# Altium PCB RodManipulator_PCB.PcbDoc
Units mm, origin at the board's own origin, x right, y up, seen from the top; angles counter-clockwise.
Board outline 49.22 x 28.83 mm, 2 copper layers (Top Layer, Bottom Layer); 64 components, 43 nets, 207 pads, 80 vias.
Unrouted connection lines stored in the file: 2.
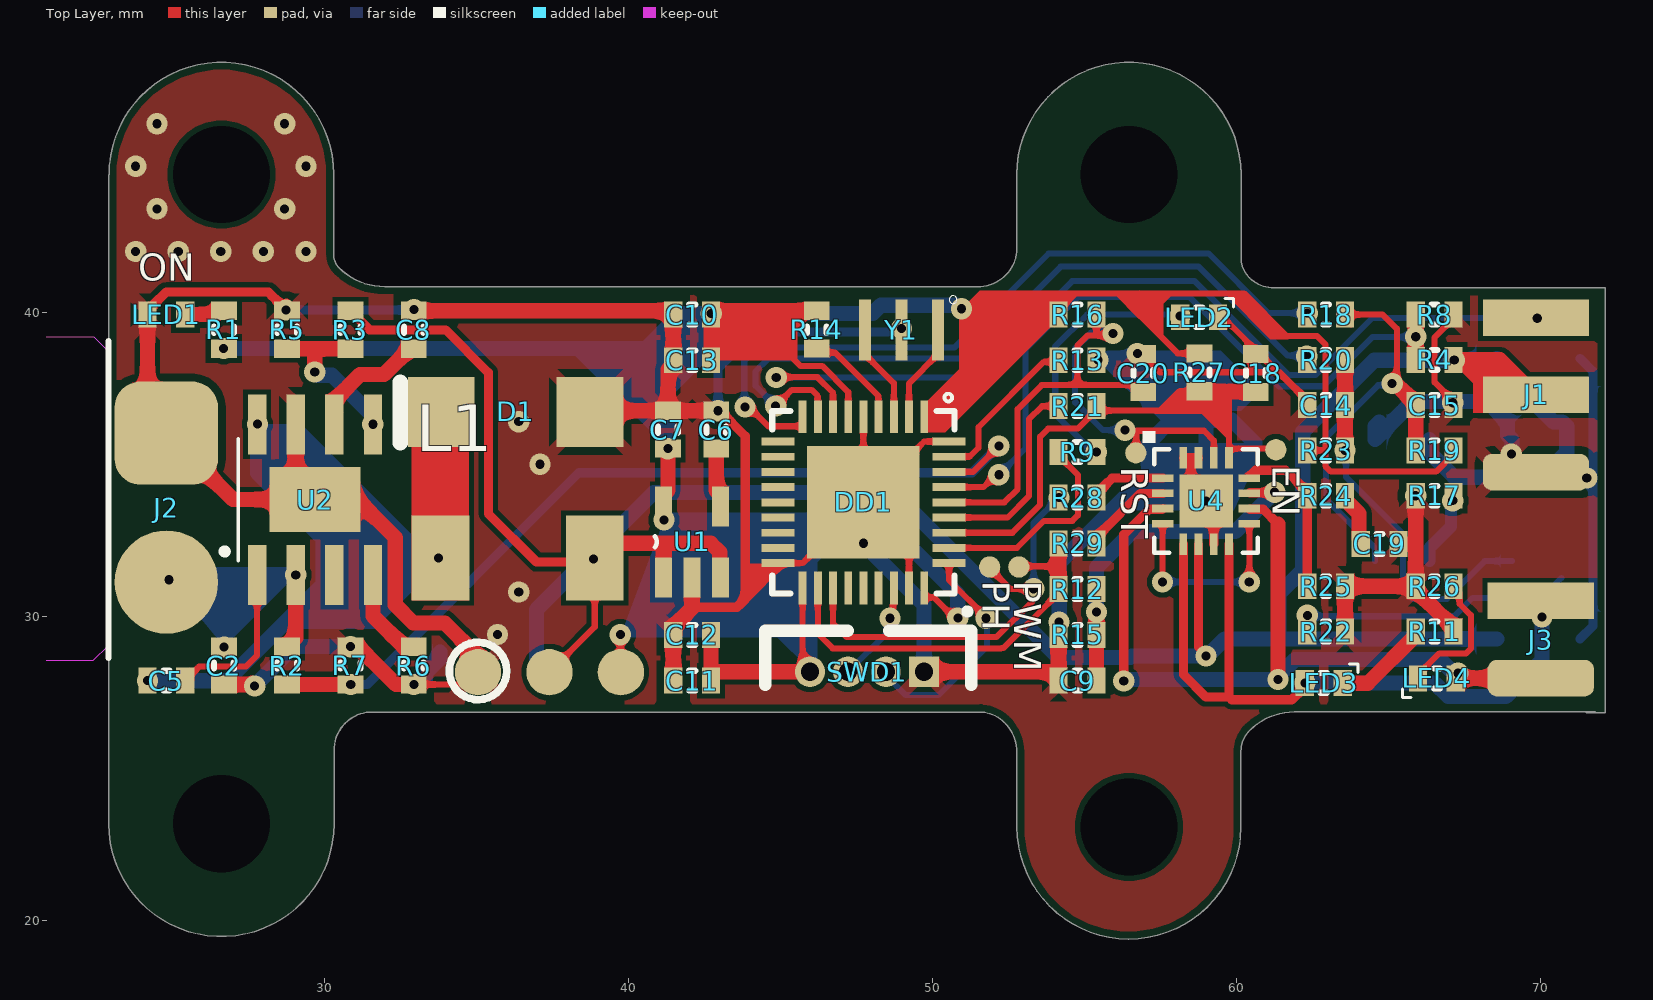
[diagram p0: Top Layer view]
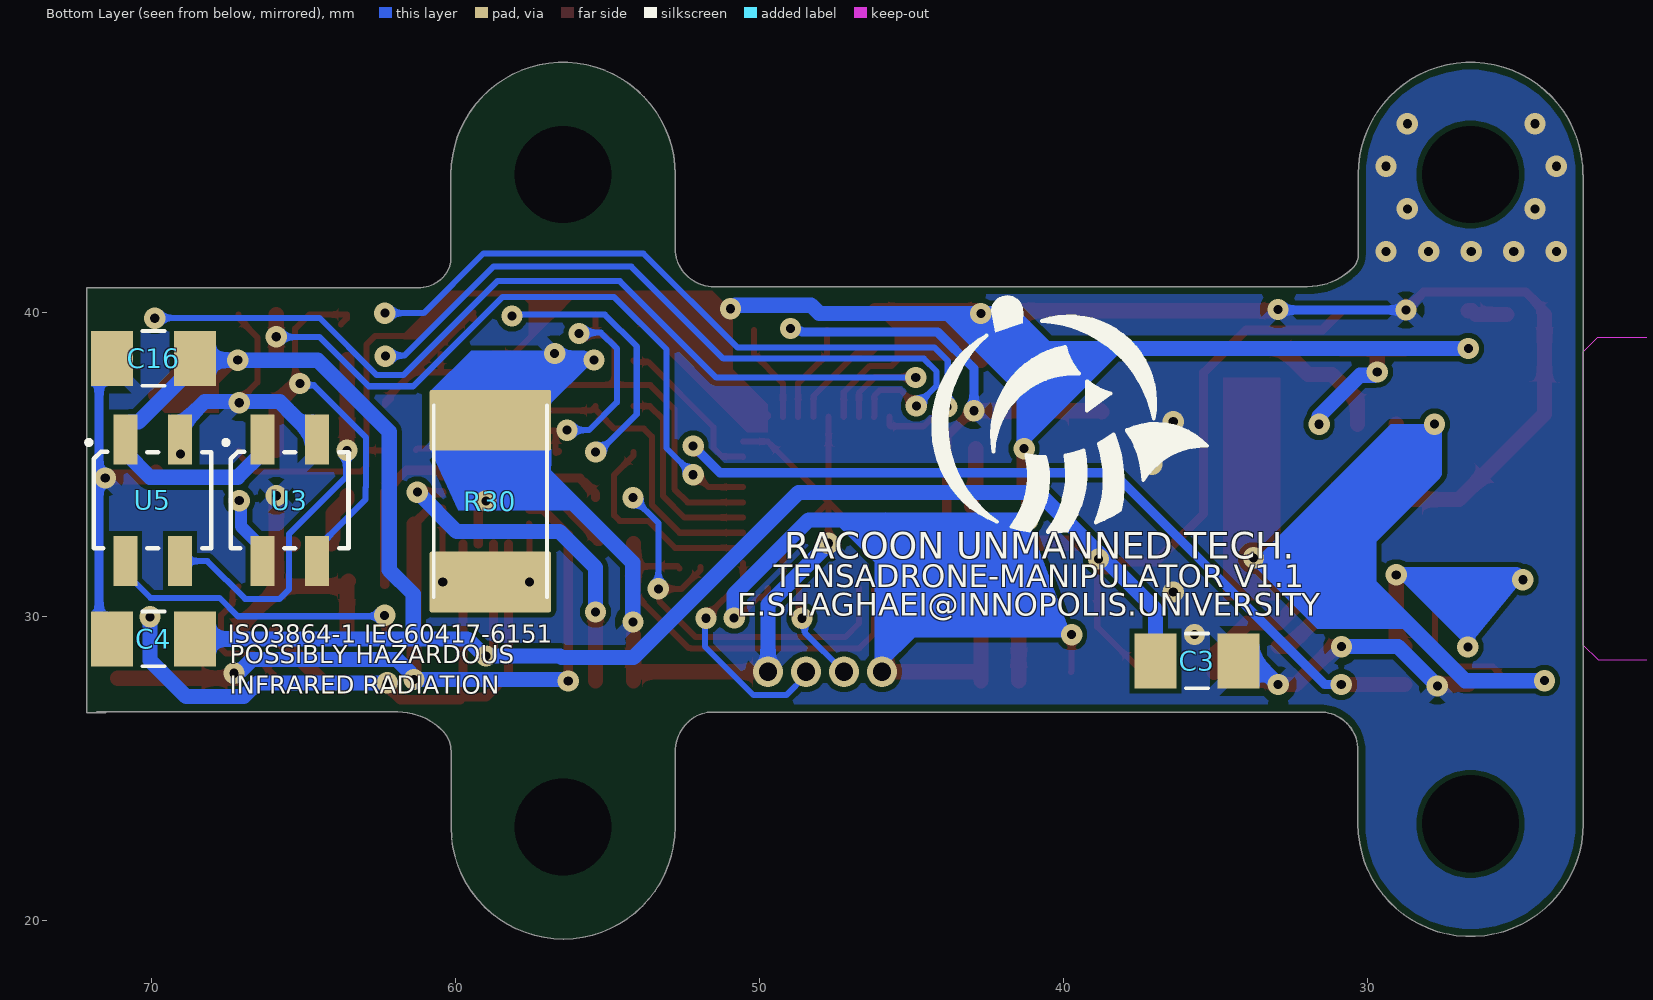
[diagram p1: Bottom Layer view, seen from below]
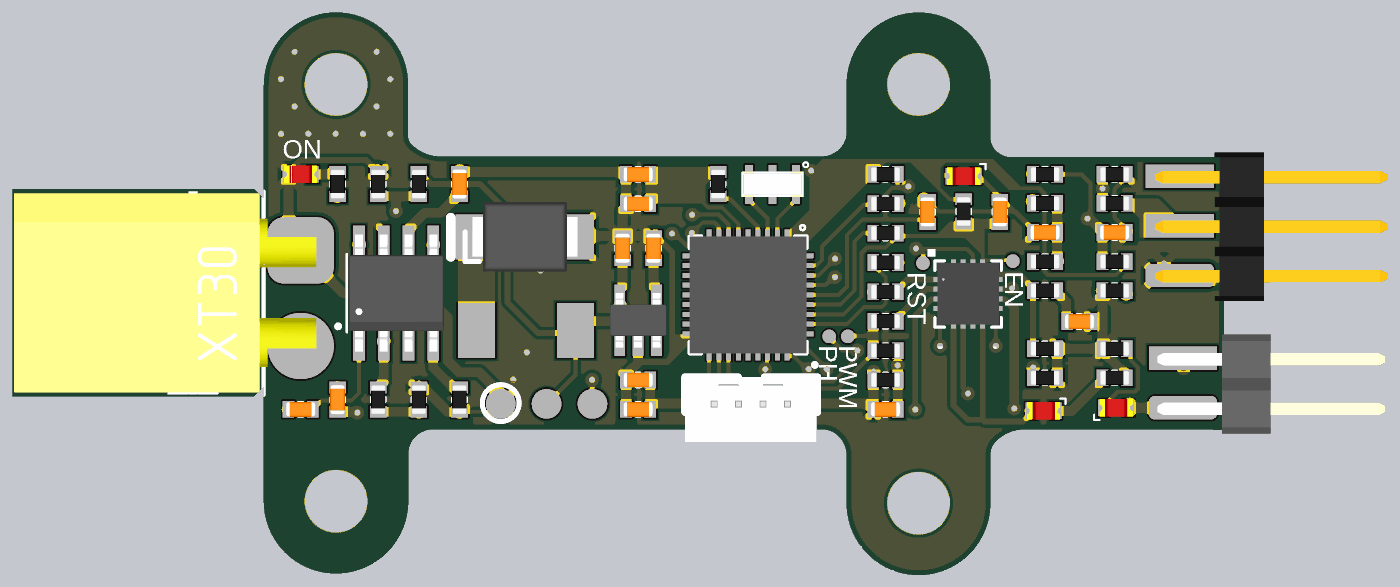
[diagram p2: 3D render of the assembled board from above, using the file's embedded part models]
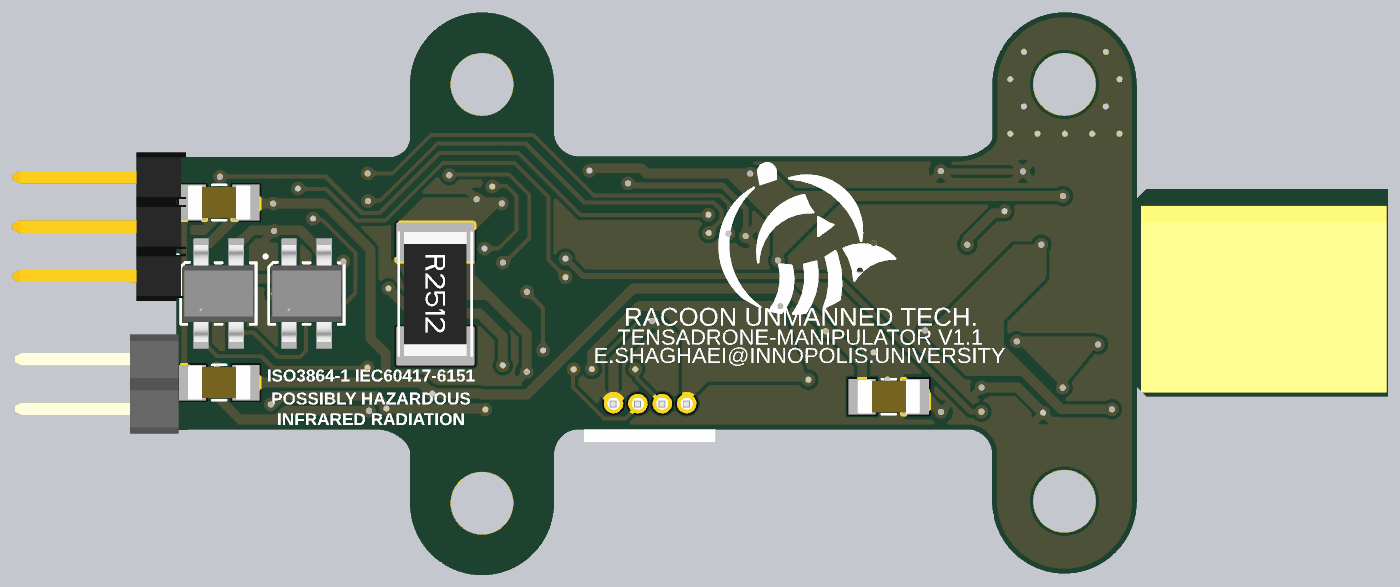
[diagram p3: 3D render of the assembled board from below, using the file's embedded part models]

## Layer stack, top to bottom
Top Solder: solder mask 0.0102, Solder Resist, Dk 3.5
Top Layer: signal copper 0.0356
Dielectric 1: dielectric 0.32, FR-4, Dk 4.8
Bottom Layer: signal copper 0.0356
Bottom Solder: solder mask 0.0102, Solder Resist, Dk 3.5

## Board outline
22.915,23.17 ccw(c26.62,23.17) 30.325,23.17 30.325,25.598 cw(c31.572,25.598) 30.69,26.48 cw(c31.583,25.587) 31.583,26.85 51.535,26.85 cw(c51.535,25.655) 52.38,26.5 cw(c51.407,25.527) 52.783,25.527 52.783,23.07 ccw(c56.47,23.07) 60.157,23.042 60.157,25.557 cw(c61.123,25.557) 60.44,26.24 60.441,26.241 cw(c61.913,24.769) 61.913,26.851 71.806,26.851 71.508,26.831 72.131,26.831 72.131,40.8 61.237,40.8 cw(c61.237,41.926) 60.441,41.13 cw(c61.124,41.813) 60.158,41.813 60.158,44.53 ccw(c56.47,44.53) 52.782,44.53 52.782,42.08 cw(c51.58,42.08) 52.43,41.23 cw(c51.488,42.172) 51.488,40.84 31.987,40.84 cw(c31.987,42.957) 30.49,41.46 cw(c30.914,41.884) 30.314,41.884 30.314,44.53 ccw(c26.62,44.53) 22.926,44.53 ccw(c22.951,44.505) 22.915,44.505

## Design rules (kind name [scope] priority, off if disabled: settings)
BoardOutlineClearance [All] p1: gap=0.25 ignorepadtopadclearanceinfootprint=FALSE
Clearance [All] p1: gap=0.17 ignorepadtopadclearanceinfootprint=FALSE
ComponentClearance [All] p1: gap=0.01 collisioncheckmode=3 verticalgap=0.1 showdistances=FALSE
FanoutControl Fanout_SOIC [IsSOIC] p3: bgadir=Out bgaviamode=Closest fanoutstyle=Auto fanoutdirection=Alternating viagrid=0.025 // Fanout_SOIC (Default Rule)
FanoutControl Fanout_Small [(CompPinCount < 5)] p4: bgadir=Out bgaviamode=Closest fanoutstyle=Auto fanoutdirection=OutThenIn viagrid=0.025 // Fanout_Small (Default Rule)
FanoutControl Fanout_Default [All] p5: bgadir=In bgaviamode=Closest fanoutstyle=Auto fanoutdirection=Alternating viagrid=0.025 // Fanout_Default (Default Rule)
HoleSize [All] p1: absolutevalues=TRUE maxlimit=4.5 minlimit=0.3 maxpercent=80.000 minpercent=20.000
HoleToHoleClearance [All] p1: gap=0.4 allowstackedmicrovias=TRUE
MatchedLengths xtal [InNetClass('XTAL')] p1: tolerance=0.01 checknetsindiffpair=FALSE checkdiffpairvsdiffpair=TRUE checkxsignals=TRUE checkothers=TRUE
MatchedLengths EncoderSignal [InNetClass('sensor signal')] p2: tolerance=0.01 checknetsindiffpair=FALSE checkdiffpairvsdiffpair=TRUE checkxsignals=TRUE checkothers=TRUE
MinimumSolderMaskSliver [All] p1: minsoldermaskwidth=0.15
PlaneClearance [All] p1: clearance=0.2
PlaneConnect [All] p1: planeconnectstyle=Relief reliefexpansion=0.5 reliefentries=4 reliefconductorwidth=0.2 reliefairgap=0.25
PolygonConnect PolygonConnect_1 [InNet('GND')] p1: connectstyle=Relief reliefconductorwidth=0.4 reliefentries=4 polygonreliefangle="45 Angle" airgapwidth=0.254
PolygonConnect [All] p2: connectstyle=Relief reliefconductorwidth=0.3 reliefentries=4 polygonreliefangle="90 Angle" airgapwidth=0.16
RoutingCorners [All] p1: cornerstyle=45-Degree minsetback=2.5 maxsetback=2.5
RoutingPriority [All] p1 off: routingpriority=0
RoutingVias [All] p1: holewidth=0.3 width=0.7 viastyle="Through Hole" minholewidth=0.3 minwidth=0.7 maxholewidth=0.8 maxwidth=1.2
SilkToSilkClearance [All] p1: silktosilkclearance=0
SilkToSolderMaskClearance [IsPad] p1: minsilkscreentomaskgap=0 clearancetoexposedcopper=TRUE
SolderMaskExpansion [All] p1: expansion=0.1 istentingtop=FALSE
Width [All] p1: maxlimit=0.5 minlimit=0.2 preferedwidth=0.2
17 further rules are at their usual default settings.

## Components (designator, comment, footprint, x,y, rotation, side; value= is the part's Value field where it differs from the comment)
C2 "10uF" SMD_CAP_0603 26.7,28.378 r270 top
C3 "GRM31CR61A476KE15L" *CAPC3216X125N 35.619,28.53 r180 bottom value=47u
C4 "GRM31CR61A476KE15L" *CAPC3216X125N 69.94,29.254 r0 bottom value=47u
C5 "0.1uF" SMD_CAP_0603 24.81,27.881 r0 top
C6 "10nF" SMD_CAP_0603 42.894,36.135 r270 top
C7 "0.1uF" SMD_CAP_0603 41.306,36.135 r270 top
C8 "1uF" SMD_CAP_0603 32.949,39.423 r90 top
C9 "22nF" SMD_CAP_0603 54.78,27.881 r0 top
C10 "100nF" SMD_CAP_0603 42.106,39.923 r180 top
C11 "100nF" SMD_CAP_0603 42.106,27.881 r180 top
C12 "10uF" SMD_CAP_0603 42.106,29.386 r180 top
C13 "10uF" SMD_CAP_0603 42.106,38.418 r180 top
C14 "10nF" SMD_CAP_0603 62.957,36.944 r0 top
C15 "10nF" SMD_CAP_0603 66.524,36.944 r180 top
C16 "GRM31CR61A476KE15L" *CAPC3216X125N 69.94,38.48 r180 bottom value=47u
C18 "10nF" SMD_CAP_0603 60.64,38 r270 top
C19 "22nF" SMD_CAP_0603 64.715,32.38 r0 top
C20 "1nF" SMD_CAP_0603 56.94,38 r270 top
D1 "SK56" *SMB_P6SMB62AT3G(Primary) 36.3,36.72 r180 top
DD1 "STM32F103T8" *QFN50P600X600X100-37N 47.738,33.747 r270 top
J1 "Header 3" "HDR Side 3 pin" 69.861,37.28 r90 top
J2 "XT30-M" "XT30-M side" 24.81,31.125 r90 top locked
J3 "PLS-2" "HDR Side 2 pin" 70.02,30.504 r90 top
L1 "IHLP2020BZER100M01" IHLP 36.36,31.92 r180 top value=10uH
LED1 "LED" LED0603 24.832,39.9 r180 top
LED2 "LED" LED0603 58.76,39.855 r0 top
LED3 "LED" LED0603 62.857,27.828 r0 top
LED4 "LED" LED0603 66.624,27.933 r180 top
R1 "330R" "RES 0603 (1608X06L)" 26.7,40.046 r270 top
R2 "180K" "RES 0603 (1608X06L)" 28.783,27.756 r90 top
R3 "56K" "RES 0603 (1608X06L)" 30.866,38.801 r90 top
R4 "10K" "RES 0603 (1608X06L)" 65.902,38.433 r0 top
R5 "10K" "RES 0603 (1608X06L)" 28.783,40.046 r270 top
R6 "56K" "RES 0603 (1608X06L)" 32.949,27.756 r90 top
R7 "10K" "RES 0603 (1608X06L)" 30.866,29 r270 top
R8 "10K" "RES 0603 (1608X06L)" 67.146,39.923 r180 top
R9 "330R" "RES 0603 (1608X06L)" 55.402,35.407 r180 top
R11 "22K" "RES 0603 (1608X06L)" 67.146,29.495 r180 top
R12 "200K" "RES 0603 (1608X06L)" 54.158,30.891 r0 top
R13 "10K" "RES 0603 (1608X06L)" 55.402,38.418 r180 top
R14 "10K" "RES 0603 (1608X06L)" 46.2,40.048 r270 top
R15 "47K" "RES 0603 (1608X06L)" 55.402,29.386 r180 top
R16 "18K" "RES 0603 (1608X06L)" 55.402,39.923 r180 top
R17 "330R" "RES 0603 (1608X06L)" 65.902,33.964 r0 top
R18 "10K" "RES 0603 (1608X06L)" 63.579,39.923 r180 top
R19 "10K" "RES 0603 (1608X06L)" 67.146,35.454 r180 top
R20 "10K" "RES 0603 (1608X06L)" 62.334,38.433 r0 top
R21 "330R" "RES 0603 (1608X06L)" 55.402,36.912 r180 top
R22 "330R" "RES 0603 (1608X06L)" 63.579,29.495 r180 top
R23 "10K" "RES 0603 (1608X06L)" 62.334,35.454 r0 top
R24 "1K" "RES 0603 (1608X06L)" 62.334,33.964 r0 top
R25 "47K" "RES 0603 (1608X06L)" 62.334,30.985 r0 top
R26 "22K" "RES 0603 (1608X06L)" 65.902,30.985 r0 top
R27 "39K" "RES 0603 (1608X06L)" 58.79,37.4 r90 top
R28 "330R" "RES 0603 (1608X06L)" 55.402,33.902 r180 top
R29 "330R" "RES 0603 (1608X06L)" 55.402,32.397 r180 top
R30 "resistor" RES2512 58.86,33.787 r270 bottom value=1.043R1W
SWD1 "SM04B-GHS-TB(LF)(SN)-" JST_4Pin-Trough 47.855,24.824 r0 top
U1 "SPX3819M5-L-3-3/TR" *SOT95P280X145-5N 42.1,32.446 r90 top value=3V3
U2 "LMR16030SDDAR" "*SOIC127P600X170-9N - duplicate" 29.7,33.837 r90 top
U3 "QRE1113GR" SMD4_2P90X3P60_ONS 65.46,33.815 r90 bottom
U4 "STSPIN250" VFQFPN-16 59.01,33.792 r0 top
U5 "QRE1113GR" SMD4_2P90X3P60_ONS 69.97,33.815 r90 bottom
Y1 "CSTCE8M00G55-R0" *OSC_CSTCE8M00G55-R0 48.988,39.412 r180 top

## Footprints (in the part's own frame and the unit in brackets; to place one, negate y for a bottom-side part, rotate by r counter-clockwise, add the part's x,y. Pads: shape width x height; smd on the part's side, far side on the other; paste and mask are expansions set on the pad)
*CAPC3216X125N [mm]
  rect 1.38x1.82 smd: 1(-1.369,0) 2(1.369,0)
  silkscreen extent -0.36,-0.9 0.36,0.9, body extent -1.6,-0.87 1.6,0.87, height 1.71
*OSC_CSTCE8M00G55-R0 [mm]
  rect 0.4x2 smd: 1(-1.2,0) 2(0,0) 3(1.2,0)
  silkscreen extent -1.83,-1.13 -1.57,-0.87, body extent -1.6,-0.65 1.6,0.65, height 1
*QFN50P600X600X100-37N [mm]
  rect 1.08x0.26 smd: 1(-2.815,2) 2(-2.815,1.5) 3(-2.815,1) 4(-2.815,0.5) 5(-2.815,0) 6(-2.815,-0.5) 7(-2.815,-1) 8(-2.815,-1.5) 9(-2.815,-2) 19(2.815,-2) 20(2.815,-1.5) 21(2.815,-1) 22(2.815,-0.5) 23(2.815,0) 24(2.815,0.5) 25(2.815,1) 26(2.815,1.5) 27(2.815,2)
  rect 0.26x1.08 smd: 10(-2,-2.815) 11(-1.5,-2.815) 12(-1,-2.815) 13(-0.5,-2.815) 14(0,-2.815) 15(0.5,-2.815) 16(1,-2.815) 17(1.5,-2.815) 18(2,-2.815) 28(2,2.815) 29(1.5,2.815) 30(1,2.815) 31(0.5,2.815) 32(0,2.815) 33(-0.5,2.815) 34(-1,2.815) 35(-1.5,2.815) 36(-2,2.815)
  rect 3.7x3.7 smd: 37(0,0)
  silkscreen extent -3.57,-3 3,3, body extent -3,-3 3,3, height 1
*SMB_P6SMB62AT3G(Primary) [mm]
  rect 2.2x2.3 smd: A(-2.45,0) C(2.45,0)
  body extent -2.72,-1.78 2.72,1.78, height 2.49
"*SOIC127P600X170-9N - duplicate" [mm]
  rect 1.97x0.6 smd: 1(-2.475,1.905) 2(-2.475,0.635) 3(-2.475,-0.635) 4(-2.475,-1.905) 5(2.475,-1.905) 6(2.475,-0.635) 7(2.475,0.635) 8(2.475,1.905)
  rect 2.13x3 smd: 9(0,0)
  silkscreen extent -2,2.52 2,3.07, body extent -3,-2.45 3,2.45, height 1.69
*SOT95P280X145-5N [mil]
  rect 52x22 smd: 1(-46,37) 2(-46,0) 3(-46,-37) 4(46,-37) 5(46,37)
  silkscreen extent -7,46 7,48, body extent -55,-57 55,57, height 57
"HDR Side 2 pin" [mm]
  rrect50% 1.2x3.5 smd: 1(-2.54,0)
  rect 1.2x3.5 smd: 2(0,0)
  body extent -3.87,-10.37 1.21,1.31, height 1.62
"HDR Side 3 pin" [mm]
  rrect50% 1.2x3.5 smd: 1(-2.54,0)
  rect 1.2x3.5 smd: 2(0,0) 3(2.54,0)
  body extent -3.85,-10.67 3.77,1.27, height 1.97
IHLP [mil]
  rect 75x110 smd: 1(-100,0) 2(100,0)
  body extent -100,-100 100,100, height 79
JST_4Pin-Trough [mm]
  rect 1x1 / inner round 0 / far side round 1 hole 0.6: 1(1.875,3.35)
  round 1 / inner round 0 / far side round 1 hole 0.6: 2(0.625,3.35) 3(-0.625,3.35) 4(-1.875,3.35)
  silkscreen extent -3.34,2.92 3.43,5.43, body extent -3.35,1.39 3.39,4.72, height 4.22
LED0603 [mm]
  rect 0.6x0.85 smd: 1(-0.6,-0.021) 2(0.644,-0.021)
  body extent -0.82,-0.48 0.88,0.42, height 0.9
RES2512 [mm]
  rrect7% 2x4 smd: 1(-2.66,0) 2(2.66,0)
  silkscreen extent -3.15,-1.87 3.15,1.87, body extent -3.17,-1.6 3.18,1.6, height 0.55
"RES 0603 (1608X06L)" [mm] "Chip Resistor, 2-Leads, Body 1.6x0.8mm, IPC High Density _ (0.063W)"
  rect 0.6x0.85 smd: 1(0,0) 2(1.244,0)
  silkscreen extent 0.52,-0.33 0.72,0.33, body extent -0.14,-0.38 1.38,0.38, height 0.45
SMD4_2P90X3P60_ONS [mm]
  rect 1.651x0.787 smd paste+0 mask+0: 1(2,0.9) 2(-2,0.9) 3(-2,-0.9) 4(2,-0.9)
  silkscreen extent -1.57,-1.93 1.98,2.18, body extent -2.47,-1.8 2.48,1.8, height 1.88
SMD_CAP_0603 [mm]
  rect 0.6x0.85 smd: 1(-0.622,0) 2(0.622,0)
  silkscreen extent -0.1,-0.33 0.1,0.33, body extent -0.76,-0.38 0.76,0.38, height 0.6
VFQFPN-16 [mm]
  rect 0.708x0.255 smd paste+0 mask+0: 1(-1.421,0.75) 2(-1.421,0.25) 3(-1.421,-0.25) 4(-1.421,-0.75) 9(1.421,-0.75) 10(1.421,-0.25) 11(1.421,0.25) 12(1.421,0.75)
  rect 0.255x0.708 smd paste+0 mask+0: 5(-0.75,-1.421) 6(-0.25,-1.421) 7(0.25,-1.421) 8(0.75,-1.421) 13(0.75,1.421) 14(0.25,1.421) 15(-0.25,1.421) 16(-0.75,1.421)
  rect 1.753x1.753 smd paste+0 mask+0: 17(0,0)
  silkscreen extent -2.08,-1.7 1.7,2.3, body extent -1.57,-1.57 1.58,1.58, height 0.94
"XT30-M side" [mm]
  rrect50% 3.4x3.4 smd: MINUS(4.9,0)
  round 3.4 smd: PLUS(0,0)
  Top Layer pour cut-out: -1.75,1.9 -1.75,0 0,-1.75 4.775,-1.75 6.65,0.125 6.65,2.7 -1.625,2.7 -1.775,2.55
  Keep-Out Layer board cut-out: -2.575,14.775 -2.575,2.4 -2.075,1.9 7.575,1.9 8.05,2.375 8.05,14.775
  silkscreen extent -2.5,1.9 7.93,1.9, body extent -2.47,-0.8 7.93,14.7, height 4

## Part data
C2 C5 C6 C7 C8 C9 C10 C11 C12 C13 C14 C15 C18 C19 C20: library part Cap-Bipolar, "Bipolar Capacitor", Voltage=100V, Adding Date=1387/12/20, Designer="Saeid Jorablo", Organazation=ControTec
C3 C4 C16: "Multilayer Ceramic Capacitor, GRM Series, 47 - F, - 10%, X5R, 10 V, 1206 [3216 Metric]", Package="1206 Murata Electronics", MF="Murata Electronics", MP=GRM31CR61A476KE15L, SnapEDA_Link=https://www.snapeda.com/parts/GRM31CR61A476KE15L/Murata%20Electronics%20North%20America/view-part/?ref=snap, Type=SMD
D1: "Диод Шоттки 5А 60В [SMB / DO-214AA]", Package="DO-214 Littelfuse", ChipDip_Link=https://www.chipdip.ru/product/sk56, MF="Littelfuse Inc.", MP=SK56, SnapEDA_Link=https://www.snapeda.com/parts/P6SMB62AT3G/Littelfuse%20Inc./view-part/?ref=snap, Type=SMD
DD1: "STM32F103T8U6, Микроконтроллер 32BIT ARM 64K FLASH [VFQFPN-36]", Package=VFQFPN-36, ChipDip_Link=https://www.chipdip.ru/product/stm32f103t8u6-2, HelpURL=http://www.st.com/stonline/products/literature/ds/13587.pdf, MF=STM, MP=STM32F103T8U6, SnapEDA_Link=https://www.snapeda.com/parts/STM32F103T8U6TR/STMicroelectronics/view-part/?ref=search&t=STM32F103T8U6, Type=SMD
J1: "Header, 3-Pin", LatestRevisionDate=17-Jul-2002, LatestRevisionNote="Re-released for DXP Platform.", Publisher="Altium Limited"
J2: Package="Package Analog Devices", Availability=Unavailable, MF=AMASS, MP=XT60-M, Price=None, SnapEDA_Link=https://www.snapeda.com/parts/XT60-M/AMASS/view-part/?ref=snap
J3: "Header, 2-Pin", ChipDip_Link=https://www.chipdip.ru/product/pls-2, HelpURL=https://static.chipdip.ru/lib/227/DOC000227157.pdf, MF="Connfly electronic (Zhenqin)", MP="PLS-3 (DS1021-1x3)", System=Connector, Type=SMD
L1: "10µH Shielded Molded Inductor 2.3A 199mOhm Max Nonstandard", Package="Nonstandard Vishay", ChipDip_Link=https://www.chipdip.ru/product/ihlp2020bzer100m11-inductor-ihlp-smd-2020-10, HelpURL=http://www.vishay.com/docs/34253/ihlp-2020bz-01.pdf, MF="Vishay Dale", MP=IHLP2020BZER100M01, SnapEDA_Link=https://www.snapeda.com/parts/IHLP2020BZER100M01/Vishay%20Dale/view-part/44808/?ref=snap, Type=SMD
R1 R2 R3 R4 R5 R6 R7 R8 R9 R11 R12 R13 R14 R15 R16 R17 R18 R19 R20 R21 R22 R23 R24 R25 R26 R27 R28 R29: library part Resistor, "Resistor", Power="1/8 W", Tolerance=5%
R30: "Resistor", LatestRevisionDate=17-Jul-2002, LatestRevisionNote="Re-released for DXP Platform.", PackageReference=AXIAL-0.4, Published=8-Jun-2000, Publisher="Altium Limited"
SWD1: library part "SWD SM04B-GHS-TB(LF)(SN)-", "Conn Shrouded Header HDR 4 POS 1.25mm Solder ST SMD Reel", Package=None, Instructions="Do not install", MF="JST Sales", MP=SM04B-GHS-TB(LF)(SN), SnapEDA_Link=https://www.snapeda.com/parts/BM04B-GHS-TBT%28LF%29%28SN%29%28N%29/JST%20Sales%20America%20Inc./view-part/?ref=snap, System=Connector, Type=SMD
U1: "Low Dropout Voltage Regulator, Adjustable 0.5A, В±1%, 2.5 to 16 Vin, 5-Pin SOT-23", Package="SOT-23-5 Exar", ChipDip_Link=https://www.chipdip.ru/product1/8003455237, HelpURL=http://www.farnell.com/datasheets/2614478.pdf, MF="MaxLinear, Inc.", MP=SPX3819M5-L-3-3/TR, SnapEDA_Link=https://www.snapeda.com/parts/SPX3819M5-L/MaxLinear%2C%20Inc./view-part/?ref=snap, Type=SMD
U2: "LMR16030SDDAR, Conv DC-DC 4.3V to 60V Step Down Single-Out 1V to 50V 3A Automotive 8-Pin HSOP EP T/R", Package="PowerSOIC-8 Texas Instruments", ChipDip_Link=https://www.chipdip.ru/product1/8003448566, HelpURL=https://www.ti.com/lit/ds/symlink/lmr16030.pdf, MF="Texas Instruments", MP=LMR16030SDDAR, SnapEDA_Link=https://www.snapeda.com/parts/TPS54560DDA/Texas%20Instruments/view-part/?ref=snap, Type=SMD
U3 U5: "No Description Available", Built_By="Ehsan Shaghaei", ChipDip_Link=https://www.chipdip.ru/product/qre1113gr-fairchild, ComponentLink1Description="New link", Copyright="Copyright (C) 2018 Accelerated Designs. All rights reserved", Manufacturer_Part_Number=QRE1113GR, RefDes=RefDes, SourceLibrary=ON_Semiconductor_2019-12-30, Type=DEV, Vendor="ON Semiconductor"
U4: "No Description Available", Manufacturer_Part_Number=STSPIN220, Built_By="Ehsan Shaghaei", Copyright="Copyright (C) 2018 Accelerated Designs. All rights reserved", RefDes=RefDes, SourceLibrary=Update_to_database_2020-12-04, Type=DEV, Vendor=STMicroelectronics
Y1: "Ceramic Resonator 8MHz ??0.5% _Tol_ ??0.2% _Stability_ 33pF 40Ohm 3-Pin CSMD T/R", Package="SMD-3 Murata", ChipDip_Link=https://www.chipdip.ru/product1/8001783721, HelpURL=https://www.murata.com/en-eu/api/pdfdownloadapi?cate=&partno=CSTCE8M00G55-R0, MF=Murata, MP=CSTCE8M00G55-R0, SnapEDA_Link=https://www.snapeda.com/parts/CSTCE8M00G55-R0/Murata%20Electronics%20North%20America/view-part/?ref=snap, Type=SMD
LED1 LED2 LED3 LED4: Designer="Razi Research Team Of Mashhad - Hamed Jafarzadeh"

## Free pads (board coordinates)
  round 1.5 hole 3.2: 1(56.47,44.53) 2(26.62,44.53) 3(26.62,23.17) 4(56.47,23.07)
  round 0.7 smd: 5(52.849,31.62) 6(51.891,31.62) 7(61.304,35.477) 8(56.698,35.374)
  round 1.524 smd: 9(35.06,28.16) 10(37.41,28.16) 11(39.76,28.16)

## Via types
v1: diameter 0.7, hole 0.3, Top Layer to Bottom Layer, tented both sides, 80 vias

## Nets (pads, with @x,y where several pads share a name; then routed paths per layer and width w, separated by ;. In a path a pad name is that pad's centre, name@x,y a point inside that pad or via, vN(x,y) a via of type N, cw(c..) or ccw(c..) an arc to the next point about the centre after c; other vN are vias at no path point)
+3v3: C7.2 C10.1 C11.1 C12.1 C13.1 DD1.1 DD1.6 DD1.19 DD1.27 pad.11 R1.2 R14.1 R16.2 R19.1 R23.1 R27.2 SWD1.4 U1.5 | length 106
  Top Layer w0.2: v1(39.741,29.396) 39.741,28.179 pad.11 ; 45.284,40.048 45.284,38.613 45.663,38.234 46.378,38.234 47.238,37.374 DD1.6 ; DD1.19 45.738,28.4 SWD1.4@45.762,28.376 ; SWD1.4 SWD1.4@45.98,28.39 ; DD1.27 49.738,30.649 49.768,30.619 50.05,30.619 50.725,29.944 v1(50.843,29.944) ; DD1.1 49.738,36.62 49.768,36.65 50.885,36.65 R16.2 54.095,39.986 53.971,40.11 50.97,40.11 v1(50.967,40.114) ; R16.2@54.158,40.048 54.728,40.618 56.821,40.618 ; R27.2 58.077,38.644 56.821,39.9 56.821,40.618 ; R23.1 62.923,35.454 ; R19.1 67.146,35.329 66.576,34.759 63.116,34.759 62.935,34.94 62.935,38.939 62.663,39.212 61.668,39.212 60.262,40.618 56.821,40.618
  Top Layer w0.5: v1(41.179,33.17) 41.179,33.596 U1.5 41.16,33.996 41.306,34.141 v1(41.306,35.513) ; C11.1 C11.1@42.728,28.006 ; C12.1 C11.1@42.728,28.006 ; C13.1 C10.1 v1(42.728,39.961) 42.728,39.998 42.778,40.048 45.284,40.048 R14.1 ; SWD1.4 42.896,28.174 C11.1@42.728,28.006
  Bottom Layer w0.2: v1(39.741,29.396) 44.953,29.396 45.98,28.369 SWD1.4
  Bottom Layer w0.5: v1(26.694,38.807) 28.101,38.807 40.577,38.807 41.3,39.53 ; v1(41.179,33.17) 45.88,33.17 ; v1(41.306,35.513) 41.3,35.519 41.3,39.53 ; SWD1.4@45.98,28.369 45.98,33.07 45.88,33.17 ; v1(50.843,29.944) 50.843,30.719 48.392,33.17 45.88,33.17 ; v1@50.913,40.152 50.874,40.152 50.795,40.231 48.313,40.231 48.043,39.961 v1(42.728,39.961) 41.731,39.961 41.3,39.53
+12: C2.1 J2.PLUS R2.2 U2.2 | length 9.2
  Top Layer w0.5: J2.PLUS 24.825,31.125 v1(24.9,31.2) ; C2.1 v1(26.71,28.99) ; R2.2 29.065,29.282 v1(29.065,31.362)
  Bottom Layer w0.5: v1(24.9,31.2) 24.954,31.2 25.117,31.362 26.72,31.362 ; v1(26.71,28.99) 26.71,31.352 26.72,31.362 ; v1(29.065,31.362) 26.72,31.362
ADC_5V: DD1.33 R4.1 R8.2 | length 23.2
  Top Layer w0.2: DD1.33 51.688,34.247 52.093,34.652 v1(52.191,34.652)
  Top Layer w0.5: R4.1@65.903,38.434 v1(65.903,39.193) ; v1@65.903,39.181 R8.2@65.903,39.922
  Bottom Layer w0.2: v1(52.191,34.652) 53.069,35.531 53.069,38.776 54.792,40.499 58.468,40.499 61.403,37.564 62.862,37.564 64.479,39.18 65.89,39.18 v1(65.903,39.193)
ADC_12V: DD1.34 R2.1 R7.2 | length 28.7
  Top Layer w0.2: DD1.34 51.347,34.747 52.191,35.591 v1(52.191,35.6)
  Top Layer w0.5: R2.1 30.606,27.756 R7.2 30.868,27.758 v1(30.876,27.758)
  Bottom Layer w0.3: v1(30.876,27.758) 30.878,27.756 31.416,27.756 38.379,34.719 51.31,34.719 v1(52.191,35.6)
BOOT0: DD1.35 R13.2 | length 5.3
  Top Layer w0.2: DD1.35 50.559,35.253 51.24,35.253 51.524,35.537 51.524,36.216 53.675,38.367 54.107,38.367 R13.2
EN: DD1.31 R21.2 | length 6.6
  Top Layer w0.2: DD1.31 52.477,33.247 53.181,33.951 53.181,36.481 53.612,36.912 R21.2
ENC1: DD1.8 R20.1 | length 24.7
  Top Layer w0.2: v1(44.852,36.919) 44.86,36.919 45.386,37.445 46.033,37.445 46.23,37.248 46.23,36.57 DD1.8 ; v1(62.315,38.554) 62.334,38.554 R20.1
  Bottom Layer w0.2: v1(44.852,36.919) 44.189,37.582 44.189,38.052 44.607,38.471 51.199,38.471 54.229,41.501 58.764,41.501 61.692,38.574 62.295,38.574 v1(62.315,38.554)
ENC2: DD1.9 R18.2 | length 24.8
  Top Layer w0.2: v1(43.839,36.885) 43.974,36.885 44.61,36.25 45.708,36.25 45.738,36.28 DD1.9 ; v1(62.332,39.97) 62.334,39.968 R18.2
  Bottom Layer w0.2: v1(43.839,36.885) 43.819,36.906 43.819,38.399 44.261,38.841 50.739,38.841 53.828,41.931 59.094,41.931 61.055,39.97 v1(62.332,39.97)
FAULT: C18.2 DD1.30 pad.7 R21.1 R27.1 U4.13 | length 18.2
  Top Layer w0.2: DD1.30 52.636,32.747 53.551,33.661 53.551,35.907 53.815,36.172 54.786,36.172 55.402,36.787 R21.1 55.549,36.765 57.491,36.765 58.124,37.397 R27.1@58.653,37.397 ; 59.548,37.397 59.643,37.397 59.652,37.389 59.76,37.28 59.76,35.636 ; U4.13 59.76,35.636 ; pad.7 61.262,35.519 59.877,35.519 59.76,35.636
  Top Layer w0.5: 59.548,37.397 58.653,37.397 58.661,37.389 59.652,37.389 60.489,37.389 C18.2@60.5,37.378
FB: R3.1 R5.2 U2.5 | length 5.7
  Top Layer w0.5: R5.2 29.824,38.801 ; v1(29.691,38.037) 29.691,38.667 29.824,38.801 ; R3.1 29.824,38.801 ; v1(31.603,36.313) U2.5
  Bottom Layer w0.5: v1(29.691,38.037) 29.802,37.925 30.255,37.925 31.603,36.577 v1(31.603,36.313)
GND: C2.2 C3.2 C4.2 C6.1 C7.1 C8.2 C9.1 C10.2 C11.2 C12.2 C13.2 C14.1 C15.1 C16.1 C18.1 C19.2 C20.1 D1.A DD1.5 DD1.18 DD1.26 DD1.36 DD1.37 J1.1 J2.MINUS LED1.2 LED2.2 pad.9 R5.1 R6.1 R7.1 R8.1 R11.1 R13.1 R15.2 R17.1 R22.1 R25.2 R26.1 R30.1 SWD1.1 U1.2 U2.7 U2.9 U3.4 U4.7 U4.15 U4.16 U4.17 U5.4 Y1.2 | length 170.4
  Top Layer w0.2: U2.9@29.33,33.837 U2.9 ; R6.1 34.407,27.756 pad.9@34.442,27.791 ; DD1.18 45.738,31.747 DD1.37 ; DD1.5 DD1.37 ; v1(47.743,32.4) DD1.37@47.743,33.741 ; DD1.26 49.238,32.247 DD1.37@47.743,33.741 ; DD1.36 49.738,35.747 DD1.37 ; R13.1 55.412,38.427 v1(55.452,38.427) ; v1(56.748,38.642) 56.873,38.642 57.073,38.442 57.488,38.026 60.441,38.026 ; LED2.2 LED2.2@59.454,39.785 ; LED2.2@59.416,39.987 61.377,38.026 ; C18.1@60.5,38.622 60.5,38.085 60.441,38.026 ; C15.1@67.096,37.119 66.523,37.692 66.523,39.175 67.146,39.798 R8.1 ; DD1.37 DD1.37@47.743,33.741 ; 60.441,38.026 61.377,38.026 ; 61.377,38.026 61.426,38.026 62.134,37.317 C14.1@62.134,37.269 ; 61.377,38.026 C14.1@62.134,37.269 ; C14.1@62.134,37.269 62.334,37.069 C14.1 62.134,37.144 C14.1@62.134,37.269
  Top Layer w0.3: LED1.2 24.188,40.046 24.808,40.666 28.163,40.666 R5.1@28.756,40.072 ; v1(28.747,40.072) R5.1@28.756,40.072 ; R5.1@28.76,40.184 R5.1@28.76,40.072 ; R5.1@28.76,40.3 28.783,40.277 R5.1 R5.1@28.76,40.069 ; 42.321,30.297 43.581,30.297 43.851,30.568 ; C6.1 v1(42.957,36.758) 43.019,36.758 43.851,35.925 43.851,30.568 ; DD1.18@45.008,31.724 43.851,30.568 ; U4.16 58.51,35.213 ; U4.15 58.51,35.213 ; U4.7 59.26,33.542 v1(59.01,33.792) 58.51,34.292 58.51,35.213 ; R5.1@28.756,40.072 R5.1@28.76,40.069 ; R5.1@28.756,40.072 R5.1@28.76,40.072 ; R5.1@28.76,40.069 R5.1@28.76,40.072
  Top Layer w0.5: LED1.2 24.188,36.647 J2.MINUS 26.998,33.837 U2.9@29.33,33.837 ; C2.2 27.576,27.756 27.62,27.8 v1(27.714,27.706) ; U2.7 29.065,34.472 U2.9 30.767,33.837 30.77,33.84 31.08,33.84 32.34,32.58 32.34,30.37 32.93,29.78 33.966,29.78 35.06,28.686 pad.9 ; v1(30.866,29) 31.11,29 32.359,27.751 v1(32.949,27.751) R6.1 R6.1@32.824,27.756 ; C8.2 32.949,40.056 32.958,40.066 v1(32.958,40.091) ; C8.2@32.951,40.048 41.434,40.048 41.484,39.998 C10.2 C13.2 41.484,38.293 41.306,38.115 C7.1 ; D1.A 38.788,36.758 C7.1 ; C11.2 C12.2 41.534,29.436 41.534,29.698 42.1,30.264 ; 42.1,30.297 U1.2 ; C6.1 C7.1 ; SWD1.1 53.989,28.174 C9.1@54.158,28.006 ; C9.1 C9.1@54.158,28.006 ; R15.2 C9.1@54.158,28.006 ; R25.2@63.524,31.16 63.529,31.16 63.579,31.11 R25.2 ; R22.1 R25.2 ; C19.2 65.347,32.371 65.883,32.371 ; v1(65.902,33.964) R26.1 R26.1@65.902,30.935 ; R11.1 67.146,29.62 65.957,30.81 65.952,30.81 65.902,30.86 R26.1@65.902,30.935 ; J1.1 70.019,34.582 71.493,34.582 v1(71.531,34.544) ; R25.2 65.852,30.985 R26.1@65.902,30.935
  Bottom Layer w0.2: v1(55.452,38.427) 55.575,38.427 55.789,38.642 v1(56.748,38.642)
  Bottom Layer w0.3: v1(28.747,40.072) v1@32.702,40.072 ; v1(32.958,40.091) v1@32.958,40.272 ; v1(42.957,36.758) 42.957,38.151 44.154,39.348 48.612,39.348 48.649,39.385 48.911,39.385 v1(48.988,39.461) ; C4.2 71.731,29.676 71.731,38.058 C16.1
  Bottom Layer w0.5: v1(27.714,27.706) 29.008,29 v1(30.866,29) ; v1(32.949,27.751) 33.807,28.609 C3.2@33.807,28.828 ; v1(47.743,32.4) 47.743,32.375 49.73,30.387 SWD1.1 ; v1(54.173,29.807) 54.182,29.816 54.182,31.769 57.11,34.697 57.11,35.697 R30.1@57.86,36.447 ; v1@55.575,38.427 55.823,38.427 56.378,37.872 56.436,37.872 R30.1@57.86,36.447 ; v1(59.01,33.792) 59.01,36.297 R30.1 ; R30.1@60.61,35.64 60.61,35.697 59.86,36.447 R30.1 ; U3.4@64.704,36.391 64.56,36.247 U3.4 65.546,36.802 65.546,36.815 65.792,37.061 67.029,37.061 67.03,37.06 67.215,37.06 67.216,37.061 68.256,37.061 68.926,36.391 68.926,35.959 U5.4 69.07,35.36 v1(69.05,35.34) ; v1(65.902,33.964) v1@65.921,33.984 ; R30.1@57.86,36.447 R30.1
  other v1: 35.7,29.4 36.4,30.8 37.1,35 36.4,36.4 67.123,37.021 23.8,42 25.2,42 26.6,42 28,42 29.4,42 24.5,43.4 28.7,43.4 23.8,44.8 29.4,44.8 24.5,46.2 28.7,46.2
NetC5_1: C5.1 D1.C L1.2 U2.8 | length 21.7
  Top Layer w0.5: U2.8 27.801,36.318 v1(27.804,36.318) ; v1(33.76,31.92) D1.C@33.76,36.63
  Bottom Layer w0.5: v1(24.188,27.881) 26.8,27.881 30.72,31.8 ; v1(27.804,36.318) 27.804,34.715 30.72,31.8 ; v1(33.76,31.92) 33.64,31.8 30.72,31.8
NetC5_2: C5.2 U2.1 | length 5.4
  Top Layer w0.2: C5.2 25.892,28.34 27.42,28.34 27.795,28.715 U2.1
NetC6_2: C6.2 U1.4 | length 2
  Top Layer w0.5: C6.2 42.894,34.141 43.04,33.996 U1.4
NetC8_1: C8.1 U2.6 | length 4.1
  Top Layer w0.5: U2.6 30.335,37.105 31.18,37.95 31.973,37.95 32.824,38.801 C8.1
NetC14_2: C14.2 R20.2 R23.2 U5.3 | length 12.6
  Top Layer w0.5: R23.2 v1(63.576,35.457) 63.576,36.221 63.572,36.224 63.576,36.227 63.576,36.94 C14.2 R20.2
  Bottom Layer w0.2: v1(63.576,35.457) 63.614,35.419 63.614,34.575 65.48,32.709 65.48,30.882 65.792,30.57 66.928,30.57 68.173,31.815 U5.3
NetC15_2: C15.2 R18.1 R19.2 U3.3 | length 14.4
  Top Layer w0.2: R18.1@63.779,39.598 63.579,39.798 R18.1 64.818,39.923 65.283,39.458 v1@65.283,37.613 ; v1(65.13,37.653) 65.244,37.653 v1@65.283,37.613 ; v1@65.327,37.569 v1@65.283,37.613
  Top Layer w0.5: v1@65.327,37.569 65.778,37.119 65.852,37.119 65.902,37.069 R19.2
  Bottom Layer w0.2: U3.3 64.56,32.247 62.964,33.843 62.964,34.236 62.956,34.245 62.956,35.886 64.667,37.597 65.073,37.597 v1(65.13,37.653)
NetC19_1: C19.1 R24.2 | length 1.8
  Top Layer w0.5: R24.2 63.579,33.839 64.043,33.375 64.043,32.555 64.093,32.505 C19.1
NetDD1_2: DD1.2 Y1.1 | length 3.2
  Top Layer w0.2: DD1.2 49.238,37.662 50.188,38.612 Y1.1
NetDD1_3: DD1.3 Y1.3 | length 3.2
  Top Layer w0.2: Y1.3 47.788,38.612 48.738,37.663 DD1.3
NetDD1_29: DD1.29 R9.2 | length 7
  Top Layer w0.2: DD1.29 52.79,32.247 53.677,33.134 54.607,33.134 54.791,33.318 54.791,34.649 54.158,35.282 R9.2
NetLED1_1: LED1.1 R1.1 | length 1.3
  Top Layer w0.5: LED1.1 26.45,39.921 26.575,40.046 R1.1
NetLED2_1: LED2.1 R9.1 | length 8.7
  Top Layer w0.2: v1(55.4,35.4) 55.402,35.402 R9.1 ; v1(58.148,39.879) 58.148,39.846 LED2.1
  Bottom Layer w0.2: v1(55.4,35.4) 55.292,35.4 54.047,36.645 54.047,38.876 55.093,39.921 58.106,39.921 v1(58.148,39.879)
NetLED3_2: LED3.2 R11.2 | length 3
  Top Layer w0.5: LED3.2@63.641,27.796 64.327,27.796 65.902,29.37 R11.2
NetLED4_2: LED4.2 R26.2 | length 4.5
  Top Layer w0.2: LED4.2 65.98,28.078 66.682,28.78 67.56,28.78 67.716,28.936 67.716,30.032 67.346,30.402 67.346,30.785 R26.2
NetR6_2: R6.2 U2.4 | length 3.1
  Top Layer w0.5: U2.4 31.605,30.011 32.616,29 R6.2
NetR17_2: R17.2 U3.2 | length 2.3
  Bottom Layer w0.4: U3.2 66.36,32.247 67.063,32.951 67.063,33.743 v1(67.121,33.801)
NetR22_2: R22.2 U5.2 | length 9.4
  Top Layer w0.2: R22.2 62.334,30.024 v1(62.34,30.03)
  Bottom Layer w0.2: v1(62.34,30.03) 62.37,30 67.17,30 67.77,30.6 70.04,30.6 U5.2@70.7,31.26
NetR24_1: R24.1 R25.1 U4.12 | length 5.3
  Top Layer w0.3: U4.12@60.448,34.615 60.633,34.8 61.624,34.8 62.334,34.089 R24.1 R25.1@62.334,31.048
NetR28_1: R28.1 U4.1 | length 2.5
  Top Layer w0.3: R28.1 55.402,34.027 55.917,34.542 U4.1
NetR29_1: R29.1 U4.2 | length 3
  Top Layer w0.3: R29.1@55.271,32.468 55.348,32.468 55.552,32.672 55.552,32.749 56.845,34.042 U4.2
NRST: DD1.4 R14.2 | length 3.4
  Top Layer w0.2: R14.2 46.331,38.672 46.808,38.672 48.231,37.249 48.231,36.568 DD1.4
OUT1: J3.1 LED4.1 U4.3 U4.10 | length 28.2
  Top Layer w0.3: v1(56.3,27.871) 56.3,32.687 57.133,33.52 57.567,33.52 U4.3 ; U4.10@60.454,33.52 60.888,33.52 61.374,33.033
  Top Layer w0.5: v1(61.374,27.922) 61.374,33.033 ; LED4.1 67.23,27.959 J3.1@71.117,27.959 ; LED4.1@67.293,27.959 v1(67.293,28.126)
  Bottom Layer w0.5: v1(56.3,27.871) 56.338,27.91 56.48,27.91 56.492,27.922 v1(61.374,27.922) ; v1@61.374,27.976 61.486,28.089 61.486,28.127 61.938,28.578 66.7,28.578 67.051,28.226 67.138,28.226 67.238,28.126 v1(67.293,28.126)
OUT2: J3.2 LED3.1 U4.5 U4.8 | length 23.9
  Top Layer w0.3: U4.5 58.26,28.086 59.002,27.344 59.76,27.344 ; U4.8 59.76,27.344 ; v1(62.256,27.808) 62.256,27.683 61.826,27.252 59.852,27.252 59.76,27.344
  Bottom Layer w0.5: v1(62.256,27.808) 66.522,27.808 66.974,27.356 68.868,27.356 70.06,28.549 v1(70.06,29.98)
PHASE: DD1.21 pad.6 R28.2 | length 13.9
  Top Layer w0.2: DD1.21 46.738,29.762 47.186,29.314 52.114,29.314 53.3,30.5 53.3,30.862 v1(53.338,30.9) 52.569,30.9 51.948,31.521 pad.6@51.948,31.62
  Bottom Layer w0.2: v1(53.338,30.9) 53.338,33.068 v1(54.171,33.901)
PWM: DD1.20 pad.5 R12.1 R29.2 | length 13.3
  Top Layer w0.2: DD1.20 46.238,29.432 46.726,28.944 52.267,28.944 52.273,28.95 52.341,28.95 54.006,30.615 R12.1@54.089,30.615 ; pad.5@52.635,31.57 52.709,31.644 54.158,31.644
  Top Layer w0.5: R12.1 54.158,31.644 R29.2
REF: C9.2 R12.2 R15.1 U4.11 | length 11.4
  Top Layer w0.3: U4.11@60.451,34.062 61.243,34.062 v1(61.263,34.081)
  Top Layer w0.5: C9.2 R15.1 v1(55.402,30.139)
  Bottom Layer w0.5: v1(55.402,30.139) 55.402,31.602 56.59,32.79 59.971,32.79 v1(61.263,34.081)
RST: C20.2 DD1.32 pad.8 R16.1 U4.14 | length 21.9
  Top Layer w0.2: DD1.32 52.376,33.747 52.811,34.182 52.811,36.811 53.604,37.604 53.742,37.604 53.746,37.607 54.777,37.607 ; 55.388,39.275 55.402,39.289 R16.1 ; v1(55.947,39.301) 55.874,39.228 55.105,39.228 54.777,38.9 54.777,37.607 ; pad.8@56.602,35.427 pad.8@56.647,35.382 ; pad.8 56.713,35.389 56.713,36.1 58.939,36.1 59.26,35.779 U4.14 ; C20.2@56.755,37.592 56.74,37.607 54.777,37.607
  Bottom Layer w0.2: v1(55.947,39.301) 55.917,39.331 55.225,39.331 54.702,38.808 54.702,37.037 55.619,36.12 v1(56.34,36.12)
SEN: R30.2 U4.4 U4.9 | length 6.7
  Top Layer w0.2: v1@57.578,31.143 57.578,33.031 U4.4 ; v1(60.43,31.127) U4.9@60.43,33.041
  Bottom Layer w0.2: v1(57.578,31.127) R30.2 v1(60.43,31.127)
SIGNAL_IN: DD1.7 J1.3 | length 31.3
  Top Layer w0.2: v1(44.868,37.851) 44.881,37.864 46.225,37.864 46.738,37.351 DD1.7 ; J1.3@69.871,39.826 69.874,39.826 v1(69.9,39.8)
  Bottom Layer w0.2: v1(44.868,37.851) 44.871,37.848 51.431,37.848 54.605,41.022 58.633,41.022 61.721,37.934 62.604,37.934 64.483,39.813 69.887,39.813 v1(69.9,39.8)
SWDCLK: DD1.28 SWD1.2 | length 7.6
  Top Layer w0.2: DD1.28 50.553,31.19 51.772,29.971 v1(51.772,29.934)
  Bottom Layer w0.2: SWD1.2 48.48,28.051 49.127,27.404 50.208,27.404 51.809,29.005 51.809,29.896 v1(51.772,29.934)
SWDIO: DD1.25 SWD1.3 | length 3.3
  Top Layer w0.2: v1(48.614,29.934) 48.708,30.027 48.708,30.902 DD1.25
  Bottom Layer w0.2: SWD1.3 48.518,29.462 48.518,29.716 v1@48.651,29.849
VCC: C3.1 C4.1 C16.2 J1.2 L1.1 pad.10 R3.2 R4.2 U1.1 U1.3 U3.1 U4.6 U5.1 | length 94.7
  Top Layer w0.2: pad.10 38.9,29.65 L1.1
  Top Layer w0.3: R3.2 31.492,39.42 32.39,39.42 32.391,39.421 33.44,39.421 ; 33.44,39.42 33.994,39.42 35.4,38.014 35.4,33.37 36.985,31.785 38.761,31.785 v1(38.86,31.884) ; 58.76,28.993 U4.6 ; 67.97,36.83 69.411,36.83 J1.2
  Top Layer w0.5: L1.1@38.596,31.62 L1.1@38.761,31.785 ; L1.1@39.38,32.4 41.162,32.4 ; U1.1 41.162,31.28 41.162,32.4 ; U1.3 43.01,31.307 43.01,32.107 42.717,32.4 41.162,32.4 ; R4.2@67.17,38.433 68.676,38.433 69.823,37.286 J1.2@69.871,37.286
  Bottom Layer w0.5: C3.1 36.988,30.218 40.841,34.071 48.723,34.071 54.153,28.641 56.526,28.641 56.577,28.692 v1(59.004,28.692) 59.058,28.692 59.619,29.254 C4.1 ; 61.4,29.45 61.4,30.73 62.19,31.52 62.19,36.07 64.543,38.423 v1(67.17,38.423) 68.514,38.423 C16.2@68.514,38.317 ; U3.1 66.36,35.384 67.174,34.57 70.056,34.57 70.87,35.384 U5.1 70.87,36.247 70.726,36.391 70.44,36.391 69.011,37.82 68.571,38.26 C16.2
pads on no net: DD1.10 DD1.11 DD1.12 DD1.13 DD1.14 DD1.15 DD1.16 DD1.17 DD1.22 DD1.23 DD1.24 U2.3

## Polygon pours and split planes (outlines as drawn)
GND on Top Layer "top" (solid, remove dead copper, pour order 0): 23.034,49.345 23.396,49.707 81.48,49.707 81.48,9.213 7.181,9.213 7.181,33.653 7.181,49.707 23.316,49.788
GND on Bottom Layer "top" (solid, remove dead copper, pour order 1): 4.105,50.758 87.475,50.758 87.475,13.14 4.105,13.14

## Other copper
Top Layer:
  rectangle net NetC5_1: 32.88,30.515 34.76,37.86
  region net +3v3: 42.728,38.418 42.753,38.443 42.753,40.023 46.175,40.023 45.564,39.412 45.564,38.418
  region net GND: 45.008,31.724 45.005,31.726 43.744,31.726 43.744,30.675 43.851,30.568
  region net +3v3: 50.425,36.053 51.038,36.666 50.924,36.78 49.735,36.78 49.735,36.059 49.741,36.053
  region net +3v3: 49.732,36.969 51.921,39.158 52.077,39.002 52.077,37.842 50.826,36.591 49.738,36.591
  region net +3v3: 61.71,39.113 61.124,39.113 59.619,40.618 60.262,40.618
  region net +3v3: 57.597,40.273 57.936,40.612 57.936,40.651 57.361,40.651 57.342,40.67
  region net +3v3: 56.821,39.843 56.793,39.789 55.988,40.608 57.602,40.608 57.602,39.076
  region net FAULT: 58.051,37.426 59.798,37.426 59.798,35.739 58.869,36.668 57.317,36.668 57.317,36.692
  region net VCC: 70.073,37.191 69.568,36.686 67.794,36.686 67.794,37.663 67.024,38.433 68.873,38.433 70.074,37.232
  region net +3v3: 50.885,40.032 50.885,36.65 54.158,39.923 54.158,40.048 54.823,40.714 51.567,40.714
Bottom Layer:
  region net GND: 57.11,35.697 60.553,35.697 60.84,35.49 59.924,33.478 55.98,33.478 57.11,34.608
  region net +3v3: 41.306,37.126 41.306,39.536 41.731,39.961 41.741,39.95 44.13,39.95
  region net +12: 26.71,28.99 29.065,31.345 29.065,31.362 25.062,31.362 24.9,31.2
  region net GND: 59.495,38.738 60.817,37.416 60.161,36.76 57.049,36.76 57.049,36.831 55.452,38.427 55.763,38.738
  region net +3v3: 41.179,33.17 39.754,29.361 44.988,29.361 45.98,28.369 45.98,31.533 47.617,33.17
  region net NetC5_1: 31.661,29.586 28.384,29.586 29.715,30.917 29.715,32.831 32.609,32.831 33.757,31.682
  region net NetC5_1: 27.804,36.318 29.242,36.318 33.7,31.86 33.526,31.686 30.544,31.686 30.544,31.976 27.804,34.715
  region net +3v3: 41.3,39 41.3,38.532 41.3,35.519 37.791,39.028

## Silkscreen, mask and mechanical layers (free items; w line width, h text height)
Top Overlay:
  circle w0.254: c35.06,28.2 r0.943
  lines w0.5: 32.5,35.7 32.5,37.7
  text "ON" at 23.877,40.747 h1.52
  text "EN" at 60.9,34.96 h1.52 r270
  text "RST" at 55.917,34.92 h1.52 r270
  text "PH" at 51.363,31.164 h1.52 r270
  text "PWM" at 52.401,31.164 h1.52 r270
Bottom Overlay:
  region: 37.04,36.507 cw(c39.825,37.027) 40.725,39.714 ccw(c40.942,35.743)
  region: 37.389,34.482 cw(c40.332,34.419) 37.93,36.121 ccw(c36.973,34.011) 35.295,35.607 cw(c35.371,33.239)
  region: 42.202,33.11 ccw(c40.54,37.076) 43.065,33.595 ccw(c40.857,36.235) 42.545,39.234 cw(c39.958,36.307)
  region: 42.314,35.421 ccw(c39.391,35.948) 39.961,38.863 cw(c37.883,39.393) 39.498,37.982 cw(c39.651,35.321)
  region: 38.951,33.08 cw(c40.54,37.076) 38.146,33.504 cw(c42.462,34.383) 38.36,35.987 ccw(c40.558,38.857) 38.852,35.67 ccw(c42.238,34.502)
  region: 41.722,32.941 cw(c40.54,37.076) 41.132,32.817 cw(c43.166,34.52) 40.613,35.242 ccw(c40.558,38.857) 41.231,35.305 ccw(c43.935,34.633)
  region: 38.467,37.329 ccw(c37.883,39.393) 39.233,37.727 39.233,36.771
  region: 42.25,39.349 42.37,39.993 ccw(c42.371,39.998) 42.377,39.997 ccw(c41.865,40.04) 41.353,40.04 ccw(c41.358,40.04) 41.353,40.04 ccw(c41.865,40.04) 41.353,40.029 41.353,40.04 cw(c41.865,40.04) 41.353,40.04 41.353,40.029 41.357,39.646 cw(c41.362,39.646) 41.357,39.646 ccw(c41.362,39.646) 41.36,39.641 42.243,39.345 ccw(c42.245,39.35)
  region: 40.526,32.776 cw(c40.54,37.076) 39.898,32.824 cw(c42.569,34.752) 39.35,35.45 ccw(c40.558,38.857) 39.955,35.292 ccw(c43.044,34.67)
  lines w0.01: 41.358,40.04 41.362,39.646 42.245,39.35 42.373,40.04 ; 41.36,39.989 cw(c41.865,40.04) 42.371,39.998
  lines w0.127: 35.295,35.607 cw(c36.973,34.011) 37.93,36.121 ccw(c40.332,34.419) 37.389,34.482 ccw(c35.371,33.239) 35.295,35.607 ; 37.04,36.507 cw(c40.942,35.743) 40.725,39.714 ccw(c39.825,37.027) 37.04,36.507 ; 38.146,33.504 ccw(c40.54,37.076) 38.951,33.08 cw(c42.238,34.502) 38.852,35.67 cw(c40.558,38.857) 38.36,35.987 ccw(c42.462,34.383) 38.146,33.504 ; 38.467,37.329 ccw(c37.883,39.393) 39.233,37.727 39.233,36.771 38.467,37.329 ; 39.35,35.45 ccw(c42.569,34.752) 39.898,32.824 ccw(c40.54,37.076) 40.526,32.776 cw(c43.044,34.67) 39.955,35.292 cw(c40.558,38.857) 39.35,35.45 ; 39.498,37.982 cw(c39.651,35.321) 42.314,35.421 ccw(c39.391,35.948) 39.961,38.863 cw(c37.883,39.393) 39.498,37.982 ; 40.613,35.242 ccw(c43.166,34.52) 41.132,32.817 ccw(c40.54,37.076) 41.722,32.941 cw(c43.935,34.633) 41.231,35.305 cw(c40.558,38.857) 40.613,35.242 ; 42.202,33.11 ccw(c39.958,36.307) 42.545,39.234 cw(c40.857,36.235) 43.065,33.595 cw(c40.54,37.076) 42.202,33.11
  text "RACOON UNMANNED TECH." at 49.189,31.596 h1.5
  text "TENSADRONE-MANIPULATOR V1.1" at 49.535,30.713 h1.27
  text "E.SHAGHAEI@INNOPOLIS.UNIVERSITY" at 50.748,29.774 h1.27
  text "ISO3864-1 IEC60417-6151" at 67.503,28.928 h1
  text "POSSIBLY HAZARDOUS  / INFRARED RADIATION" at 67.438,27.249 h1
Mechanical 2:
  lines w0.6: 71.508,26.831 72.131,26.831 72.131,40.8 61.237,40.8 cw(c61.237,41.926) 60.441,41.13 cw(c61.124,41.813) 60.158,41.813 60.158,44.53 ccw(c56.47,44.53) 52.782,44.53 52.782,42.08 cw(c51.58,42.08) 52.43,41.23 cw(c51.488,42.172) 51.488,40.84 31.987,40.84 cw(c31.987,42.957) 30.49,41.46 cw(c30.914,41.884) 30.314,41.884 30.314,44.53 ccw(c26.62,44.53) 22.926,44.53 ccw(c22.951,44.505) 22.915,44.505 22.915,23.17 ccw(c26.62,23.17) 30.325,23.17 30.325,25.598 cw(c31.572,25.598) 30.69,26.48 cw(c31.583,25.587) 31.583,26.85 32.26,26.85 51.535,26.85 cw(c51.535,25.655) 52.38,26.5 cw(c51.407,25.527) 52.783,25.527 52.783,23.07 ccw(c56.47,23.07) 60.157,23.042 60.157,25.557 cw(c61.123,25.557) 60.44,26.24 60.441,26.241 cw(c61.913,24.769) 61.913,26.851 71.806,26.851
Mechanical 4:
  lines w0.01: 39.9,31.8 44.3,31.8